# Altium PCB PCB22.PcbDoc
Units mil, origin at the board's own origin, x right, y up, seen from the top; angles counter-clockwise.
Board outline 4850 x 3150 mil, 2 copper layers (Top Layer, Bottom Layer); 33 components, 35 nets, 117 pads, 13 vias.
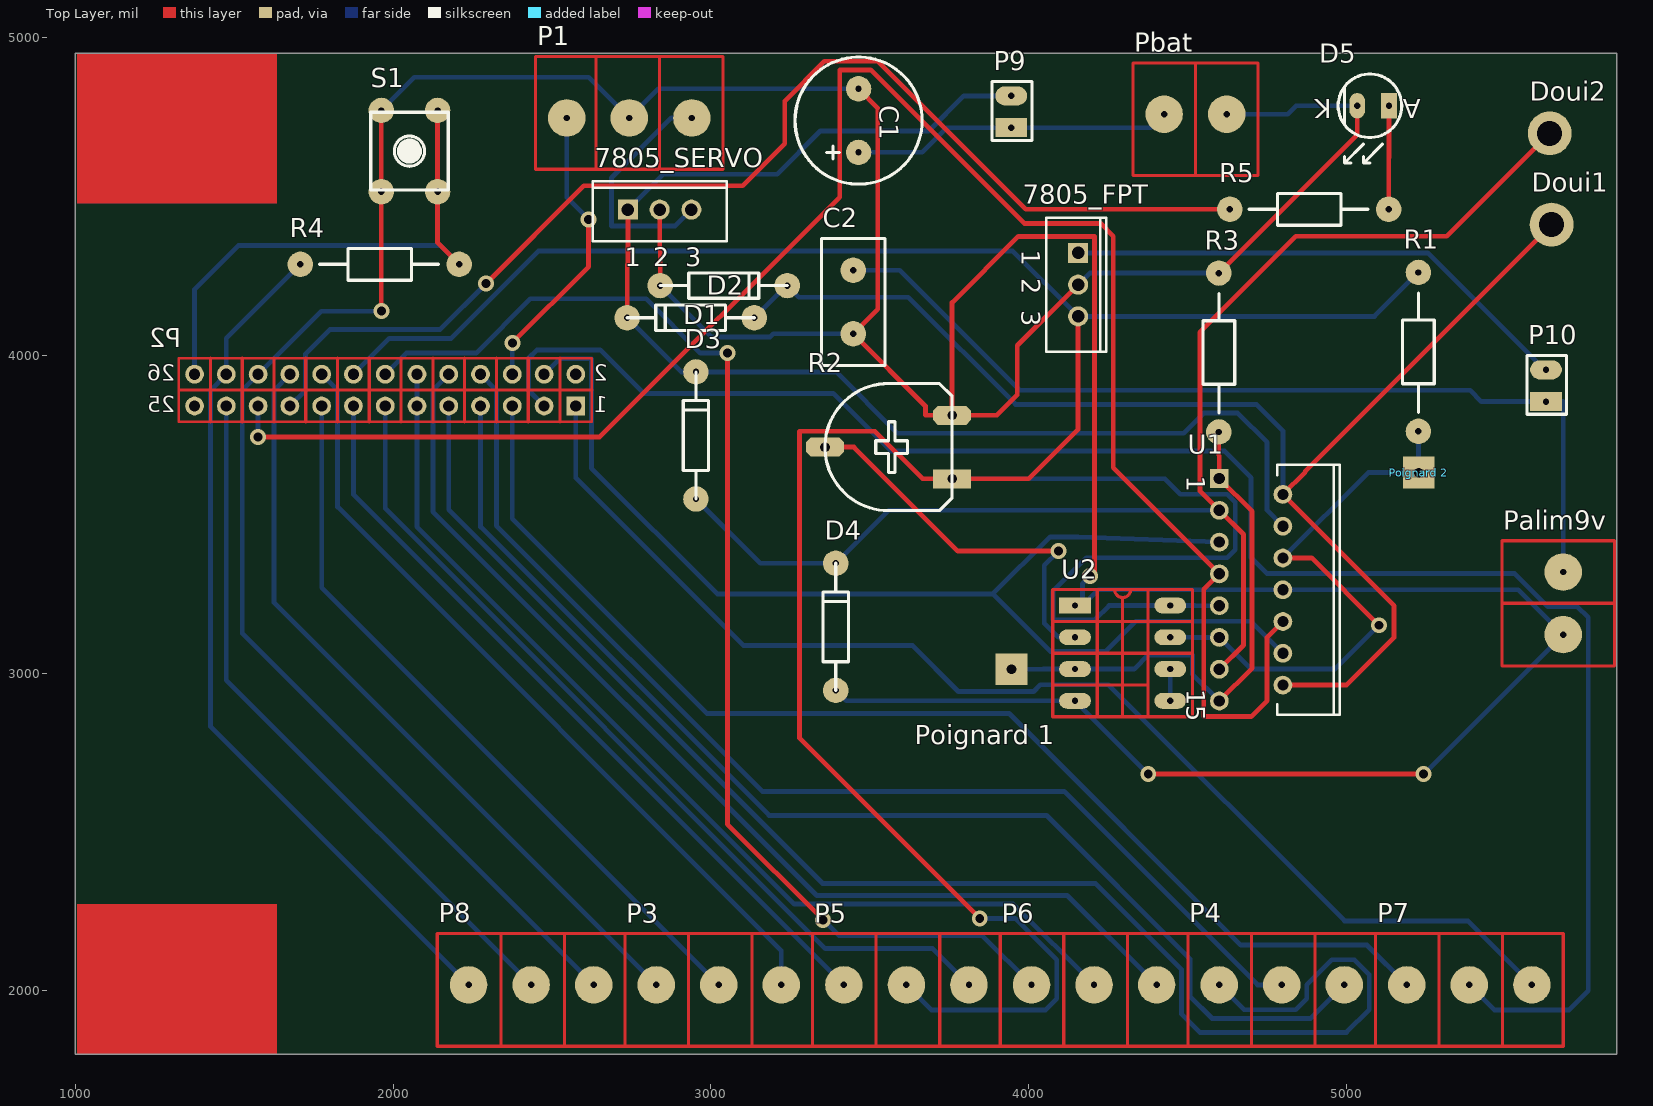
[diagram p0: Top Layer view]
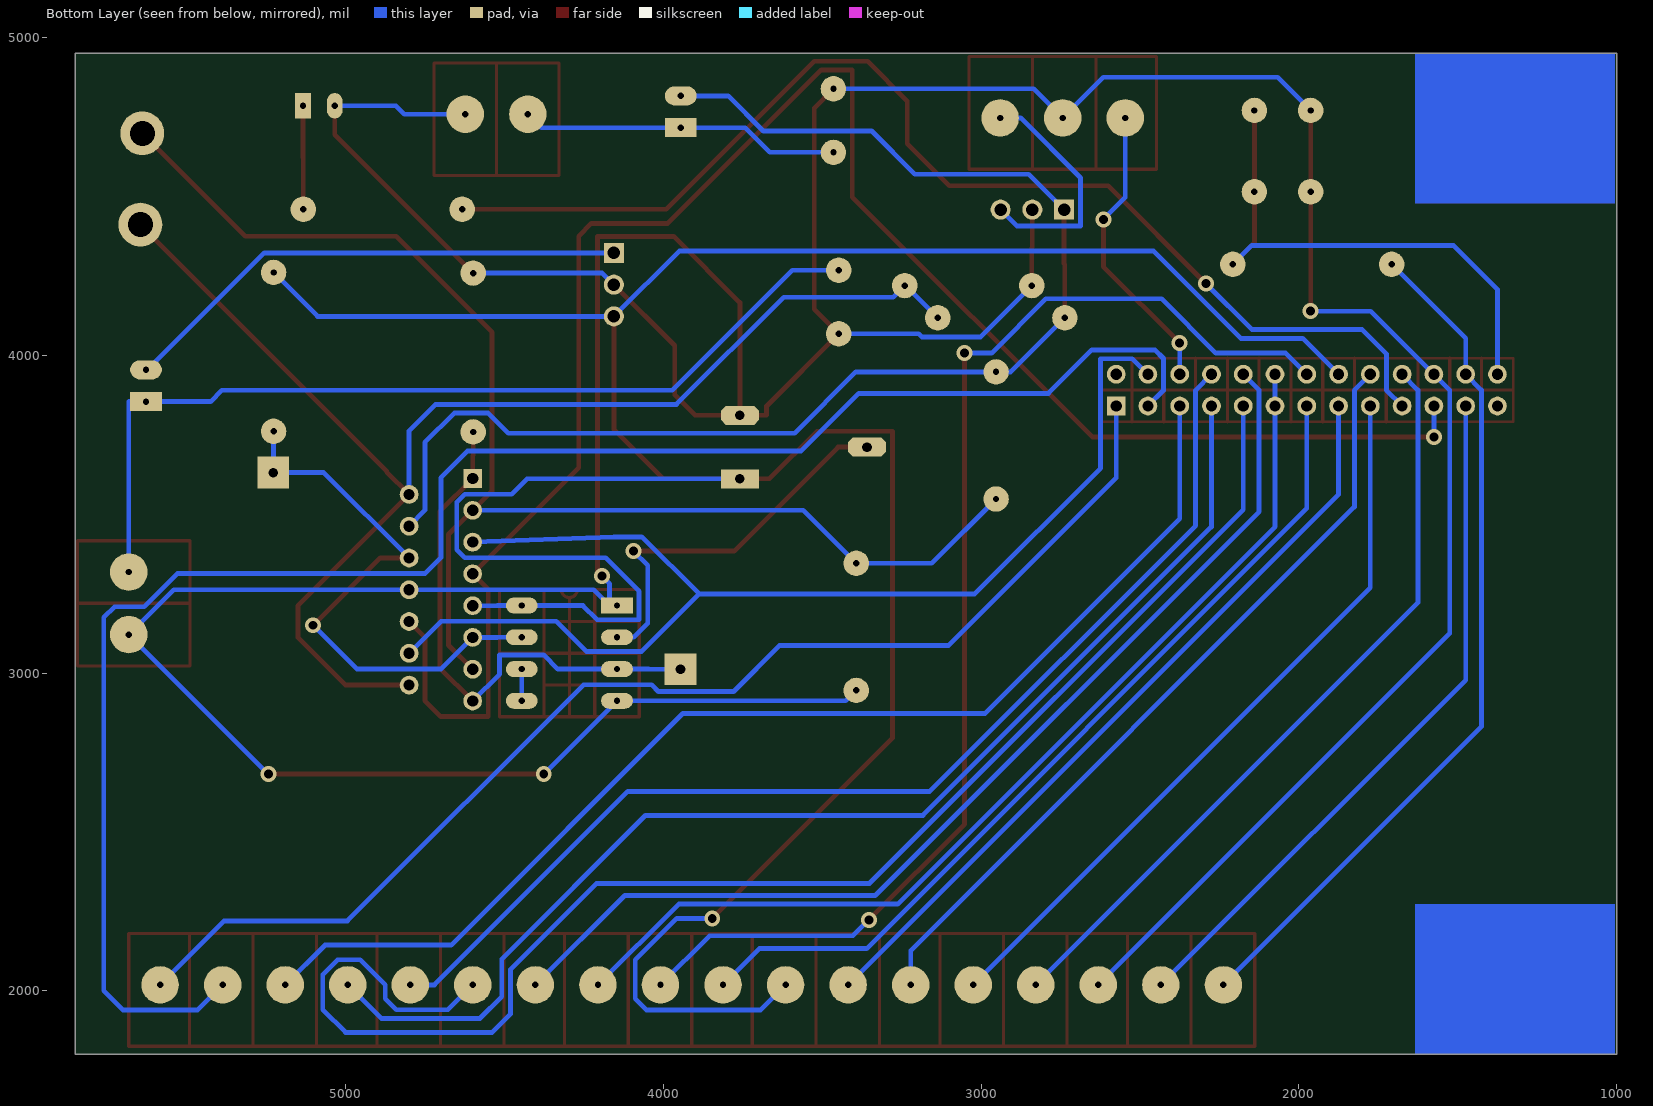
[diagram p1: Bottom Layer view, seen from below]

## Layer stack, top to bottom
Top Layer: signal copper 1.4
Dielectric: dielectric 12.6, FR-4, Dk 4.8
Bottom Layer: signal copper 1.4

## Board outline
1000,4950 5850,4950 5850,1800 1000,1800

## Design rules (kind name [scope] priority, off if disabled: settings)
Clearance [All] p1: gap=12
PolygonConnect [All] p1: connectstyle=Relief reliefconductorwidth=10 reliefentries=4 polygonreliefangle="90 Angle"
RoutingVias [All] p1: holewidth=28 width=50 viastyle="Through Hole" minholewidth=28 minwidth=50 maxholewidth=28 maxwidth=50
SilkscreenOverComponentPads [All] p1: minsilkscreentomaskgap=10
SolderMaskExpansion [All] p1: expansion=4
Width [All] p1: maxlimit=20 minlimit=15 preferedwidth=15
27 further rules are at their usual default settings.

## Classes and differential pairs
component class L298: 7805_FPT 7805_SERVO C1 C2 D1 D2 D3 D4 D5 Doui1 Doui2 P1 P3 P4 P5 P6 P7 P8 P9 P10 Palim9v Pbat "Poignard 1" R1 R2 R3 R4 R5 S1 U1 U2

## Components (designator, comment, footprint, x,y, rotation, side; value= is the part's Value field where it differs from the comment)
7805_FPT "SCR" TO-220-AB 4155.51,4222.44 r270 top
7805_SERVO "SCR" TO-220-AB 2838.58,4458.66 r0 top
C1 "Cap Pol2" Capa2_pol 3464.57,4638.78 r90 top
C2 "Cap2" CAPA2 3447.83,4267.72 r270 top
D1 "Diode 1N4148" Ddiode 2736.22,4118.11 r0 top
D2 "Diode 1N4148" Ddiode 3240.16,4219.49 r180 top
D3 "Diode 1N4148" Ddiode 2952.76,3947.83 r270 top
D4 "Diode 1N4148" Ddiode 3392.72,3345.47 r270 top
D5 "Led" LED 5133.86,4785.43 r180 top
Doui1 "douille_2mm" Douille-2mm 5645.67,4411.42 r90 top
Doui2 "douille_2mm" Douille-2mm 5639.76,4698.82 r90 top
P1 "Bornier Servomoteur" Bornier_3 3038.39,4747.05 r180 top
P2 "Header 13X2" HDR2X13 2574.8,3840.55 r180 top
P3 "Bornier_3" Bornier_3 2729.33,2018.7 r0 top
P4 "Bornier_3" Bornier_3 4500.98,2018.7 r0 top
P5 "Bornier_3" Bornier_3 3319.88,2018.7 r0 top
P6 "Bornier_3" Bornier_3 3910.43,2018.7 r0 top
P7 "Bornier_3" Bornier_3 5091.53,2018.7 r0 top
P8 "Bornier_3" Bornier_3 2138.78,2018.7 r0 top
P9 "Jumper" picot2 3944.88,4716.54 r180 top
P10 "Jumper" picot2 5627.95,3854.33 r180 top
Palim9v "Alim 9V" Bornier_2 5682.09,3416.34 r270 top
Pbat "Batterie" Bornier_2 4327.76,4758.86 r0 top
"Poignard 1" "Poignard" Poignard 3945.87,3011.81 r90 top
"Poignard 2" "Poignard" Poignard 5227.36,3630.91 r90 top
R1 "Res2" res5_1/4W 5226.38,3760.83 r90 top
R2 "RPot" AJUSTABLE 3758.86,3611.22 r90 top
R3 "Res2" res5_1/4W 4598.43,3758.86 r90 top
R4 "Res2" res5_1/4W 1707.68,4286.42 r0 top
R5 "Res2" res5_1/4W 4632.87,4459.65 r0 top
S1 "SW-PB" SW_BP 2051.18,4642.72 r90 top
U1 "L298N" Multiwatt15V 4700,3262.2 r270 top
U2 "LM311N" DIP8 4145.67,3212.6 r0 top

## Footprints (in the part's own frame and the unit in brackets; to place one, negate y for a bottom-side part, rotate by r counter-clockwise, add the part's x,y. Pads: shape width x height; smd on the part's side, far side on the other; paste and mask are expansions set on the pad)
AJUSTABLE [mil]
  rect 60x120 hole 30: 1(0,0)
  oct 60x120 hole 30: 2(100,400) 3(200,0)
  silkscreen extent -100,0 300,400
Bornier_2 [mm]
  round 3 hole 0.508: 1(2.5,0) 2(7.5,0)
  Top Layer lines w0.254: 5,-4.9 5,4.1 ; 10,-4.9 0,-4.9 0,4.1 10,4.1 10,-4.9
Bornier_3 [mm]
  round 3 hole 0.508: 1(2.5,0) 2(7.5,0) 3(12.5,0)
  Top Layer lines w0.254: 10.16,4.1 10.16,-4.9 ; 5.08,4.064 5.08,-4.9 ; 15,4.1 0,4.1 0,-4.9 15,-4.9 15,4.1
CAPA2 [mil]
  round 80 hole 20: 1(0,0) 2(200,0)
  silkscreen extent -100,-100 300,100
Capa2_pol [mil]
  round 80 hole 20: 1(0,0) 2(200,0)
  silkscreen extent -100,-200 300,200
Ddiode [mil]
  round 80 hole 20: A(400,0) K(0,0)
  silkscreen extent 0,-40 400,40
DIP8 [mil]
  rect 100x50 hole 20: 1(0,0)
  oval 100x50 hole 20: 2(0,-100) 3(0,-200) 4(0,-300) 5(300,-300) 6(300,-200) 7(300,-100) 8(300,0)
  Top Layer lines w10: 70,-350 70,50 ; 85,-350 215,-350 ; 85,50 125,50 ccw(c150,50) 175,50 215,50 ; 150,-350 150,20 ; 230,-250 30,-250 -70,-250 ; -70,-250 -70,-350 30,-350 230,-350 ; -70,-250 -70,-150 ; -70,-150 30,-150 270,-150 370,-150 ; -70,-150 -70,-50 ; -70,-50 30,-50 270,-50 370,-50 ; -70,-50 -70,50 30,50 230,50 ; 230,-350 230,50 ; 230,-350 370,-350 370,-250 370,-150 ; 230,50 320,50 370,50 370,-50 ; 370,-150 370,-50
Douille-2mm [mm]
  round 3.5 hole 2: 1(0,0)
HDR2X13 [mm] "Connector; Header; 13x2 Position"
  rect 1.5x1.5 hole 0.9: 1(0,0)
  round 1.5 hole 0.9: 2(0,-2.54) 3(2.54,0) 4(2.54,-2.54) 5(5.08,0) 6(5.08,-2.54) 7(7.62,0) 8(7.62,-2.54) 9(10.16,0) 10(10.16,-2.54) 11(12.7,0) 12(12.7,-2.54) 13(15.24,0) 14(15.24,-2.54) 15(17.78,0) 16(17.78,-2.54) 17(20.32,0) 18(20.32,-2.54) 19(22.86,0) 20(22.86,-2.54) 21(25.4,0) 22(25.4,-2.54) 23(27.94,0) 24(27.94,-2.54) 25(30.48,0) 26(30.48,-2.54)
  Top Layer lines w0.2: 31.75,1.27 -1.27,1.27 -1.27,-3.81 31.75,-3.81 31.75,1.27
  Top Layer lines w0.254: 31.623,-1.27 -1.27,-1.27 ; 29.21,1.27 29.21,-3.81 ; 26.67,1.27 26.67,-3.81 ; 24.13,1.27 24.13,-3.81 ; 21.59,1.27 21.59,-3.81 ; 19.05,1.27 19.05,-3.81 ; 16.51,1.27 16.51,-3.81 ; 13.97,1.27 13.97,-3.81 ; 11.43,1.27 11.43,-3.81 ; 8.89,1.27 8.89,-3.81 ; 6.35,1.27 6.35,-3.81 ; 3.81,1.27 3.81,-3.81 ; 1.27,1.27 1.27,-3.81
LED [mil]
  rect 50x80 hole 20: 1(0,0)
  oval 50x80 hole 20: 2(100,0)
  silkscreen extent -40,-100 160,180
Multiwatt15V [mm] "TO, Thru-Hole, Vertical, Heatsink Mounted; 15 Bent Staggered Leads; Pitch 1.27 mm"
  rect 1.5x1.5 hole 0.9: 1(-8.89,-2.54)
  round 1.5 hole 0.9: 2(-7.62,2.54) 3(-6.35,-2.54) 4(-5.08,2.54) 5(-3.81,-2.54) 6(-2.54,2.54) 7(-1.27,-2.54) 8(0,2.54) 9(1.27,-2.54) 10(2.54,2.54) 11(3.81,-2.54) 12(5.08,2.54) 13(6.35,-2.54) 14(7.62,2.54) 15(8.89,-2.54)
  silkscreen extent -10,2.09 10,7.09
picot2 [mil]
  rect 100x60 hole 20: 1(0,0)
  oval 100x60 hole 20: 2(0,-100)
  silkscreen extent -65,-145 60,40
Poignard [mil]
  rect 100x100 hole 30: 1(0,0)
res5_1/4W [mil]
  round 80 hole 20: 1(0,0) 2(500,0)
  silkscreen extent 60,-50 435,50
SW_BP [mil]
  round 80 hole 20: 1(-127.95,88.58) 2(127.95,88.58) 3(-127.95,-88.58) 4(127.95,-88.58)
  silkscreen extent -122,-122 122,122
TO-220-AB [mm] "TO, Thru-Hole, Vertical, Heatsink Mounted; 3 In-Line Leads; Pitch 2.54 mm"
  rect 1.6x1.6 hole 1: 1(-2.54,0)
  round 1.6 hole 1: 2(0,0) 3(2.54,0)
  silkscreen extent -5.35,-2.55 5.35,2.25

## Part data
7805_FPT 7805_SERVO: "Silicon Controlled Rectifier"
C1: "Polarized Capacitor (Radial)"
C2: "Capacitor"
D1 D2 D3 D4: "High Conductance Fast Diode"
D5: "LED"
Doui1 Doui2: "1-Pin"
P1: library part Bornier_3, "Header, 3-Pin"
P2: "Header, 13-Pin, Dual row"
P3 P4 P5 P6 P7 P8: "Header, 3-Pin"
Palim9v Pbat: library part Bornier_2, "Header, 2-Pin"
R1 R3 R4 R5: "Resistor"
R2: "Potentiometer"
S1: "Switch"
U1: "Dual Full Bridge Driver"
U2: "Voltage Comparator"

## Via types
v1: diameter 50, hole 28, Top Layer to Bottom Layer, 13 vias

## Nets (pads, with @x,y where several pads share a name; then routed paths per layer and width w, separated by ;. In a path a pad name is that pad's centre, name@x,y a point inside that pad or via, vN(x,y) a via of type N, cw(c..) or ccw(c..) an arc to the next point about the centre after c; other vN are vias at no path point)
3V3FLYPORT: P2.24 P8.1 R4.1 | length 2721.2
  Bottom Layer w15: R4.1 1474.8,4053.55 P2.24 1425,3890.75 1425,2830.9 P8.1
AN1_23: P2.23 P8.2 | length 2219.2
  Bottom Layer w15: P2.23 1474.8,2977.95 P8.2
AN4_18: P2.18 P3.3 | length 2521.1
  Bottom Layer w15: P2.18 1825,3890.36 1825,3523 3221.46,2126.54 P3.3
AN5_20: P2.20 P3.1 | length 2440.7
  Bottom Layer w15: P2.20 1625,3890.75 1625,3221.46 P3.1
BOARD_LED: P2.19 R5.1 | length 3746.3
  Top Layer w15: v1(2292,4226) 2600,4534 3100,4534 3232,4666 3232,4800 3357.28,4925.28 3524.72,4925.28 3990.35,4459.65 R5.1
  Bottom Layer w15: P2.19 1724,3889.75 1724,4005 1800,4081 2147,4081 v1(2292,4226)
EN: "Poignard 2.1" R1.1 U1.6 U1.11 U2.7 | length 1813.9
  Top Layer w15: U1.6 4890.75,3362.21 v1(5102.36,3150.59)
  Bottom Layer w15: U2.7 4522,3112.6 4522.39,3112.21 U1.11 4699.21,3013 4964.77,3013 v1(5102.36,3150.59) ; U1.6 5068.7,3630.91 5227.36,3630.91 5226.38,3631.89 R1.1
GND: 7805_FPT.2 7805_SERVO.2 C1.2 C2.2 D2.A D4.A D5.2 P1.2 P2.22 P8.3 Palim9v.2 Pbat.2 R2.3 R3.2 S1.1 S1.2 U1.8 U2.1 U2.4 | length 15826.2
  Top Layer w15: v1(1962.6,4139) S1.1 S1.2 ; 7805_SERVO.2 2838.58,4339.57 2840.16,4338 D2.A ; C1.2 3525,4778.35 3525,4144.88 C2.2 3675,3840.55 3675,3811.22 R2.3 ; 7805_FPT.2 3964,4030.93 3964,3875.22 3900,3811.22 R2.3 ; v1(4193,3305) 4207,3319 4207,4374 3967,4374 3758.86,4165.86 R2.3 ; v1(4376.18,2682.09) v1(5243.11,2682.09) ; R3.2 5033.86,4694.29 D5.2
  Bottom Layer w15: v1(1962.6,4139) 1773.25,4139 P2.22 1525,3890.75 1525,3124.6 P8.3 ; S1.2 2066.93,4875 2615.16,4875 P1.2 2834.84,4838.78 C1.2 ; D2.A 3001.65,4058 3186,4058 3195.72,4067.72 C2.2 ; D4.A 3425.59,2912.6 U2.4 v1(4376.18,2682.09) ; U2.1 U2.1@4169,3212.6 ; 7805_FPT.2 4191.93,4258.86 R3.2 ; v1(4193,3305) 4169,3281 U2.1@4169,3212.6 ; Pbat.2 4815,4758.86 4841.57,4785.43 D5.2 ; v1(5243.11,2682.09) Palim9v.2 5540.94,3262.21 U1.8 4218.61,3262.21 U2.1@4169,3212.6
I2C_CLK: P2.1 P7.3 | length 3913.5
  Bottom Layer w15: P2.1 2574.8,3614.2 3102,3087 3634,3087 3779,2942 4016,2942 4037,2963 4251,2963 4994,2220 5382.36,2220 P7.3
I2C_DATA: P2.3 P7.2 | length 5619.2
  Bottom Layer w15: P2.3 2425.78,3889.58 2425.78,3990 2452.78,4017 2651,4017 2788,3880 3385,3880 3566,3699 4616,3699 4700,3615 4700,3363 4750,3313 5530,3313 5634,3209 5727,3209 5761,3175 5761,2000 5701,1940 5465.51,1940 P7.2
IN1: P2.5 P7.1 | length 3777.8
  Bottom Layer w15: P2.5 2374.8,3485.5 2987.3,2873 3938,2873 4667,2144 5064.66,2144 P7.1
IN2: P2.7 P4.3 | length 3852.4
  Bottom Layer w15: P2.7 2274.8,3460.04 3182.84,2552 4056,2552 4508.12,2099.88 4508.12,1981.88 4576.86,1913.14 4887.55,1913.14 P4.3
IN3: P2.9 P4.1 | length 4743.1
  Bottom Layer w15: P2.9 2174.8,3514.23 3351.03,2338 4210,2338 4481.12,2066.88 4481.12,1926 4538.12,1869 5000,1869 5072,1941 5072,2051 5025,2098 4953.82,2098 4874.82,2019 4874.82,1975 4839.96,1940.14 4677.97,1940.14 P4.1
MOTOR1: D1.A D2.K Doui1.1 U1.2 U1.14 | length 4301.7
  Top Layer w15: U1.14 5000,2962.21 5150,3112.21 5150,3212.21 U1.2 4870,3632.21 4870,3635.75 Doui1.1
  Bottom Layer w15: D1.A 3237.6,4219.49 D2.K 3276.65,4183 3621,4183 3958.64,3845.36 4716.64,3845.36 4800,3762 U1.2
MOTOR2: D3.A D4.K Doui2.1 U1.3 U1.13 | length 4309.2
  Top Layer w15: U1.13 4676.03,3088.23 4676.03,3436.18 U1.3 4538.93,3573.28 4538.93,4072.93 4841,4375 5315.95,4375 Doui2.1
  Bottom Layer w15: D3.A 3155.12,3345.47 D4.K 3559.45,3512.21 U1.3
NetD5_1: D5.1 R5.2 | length 326.2
  Top Layer w15: R5.2 5132.87,4622 5133.86,4622.98 D5.1
"NetPoignard 1_1": "Poignard 1.1" R3.1 U1.1 U1.15 U2.3 | length 1700.7
  Top Layer w15: R3.1 4598.43,3685.57 4600,3684 U1.1 4703.03,3509.18 4703.03,3015.23 U1.15
  Bottom Layer w15: 3945.87,3011.81 4045,3011.81 4045.79,3012.6 U2.3 4331.67,3012.6 4376.17,3057.1 4515.17,3057.1 4515.17,2997.04 U1.15
NetR2_2: R2.2 U2.2 | length 1231.5
  Top Layer w15: R2.2 3450,3711.22 3777.22,3384 v1(4094,3384)
  Bottom Layer w15: v1(4094,3384) 4049.17,3339.17 4049.17,3156.43 4093,3112.6 U2.2
NetU2_5: U2.5 U2.6 | length 100
  Bottom Layer w15: U2.5 U2.6
OUT3_PWM: P2.17 P3.2 | length 2339.5
  Bottom Layer w15: P2.17 1774.8,3268.5 P3.2
PWM1: P2.4 U1.5 U1.12 | length 3797.1
  Bottom Layer w15: P2.4 2523.83,3989.58 2624,3989.58 2624,3645 3020,3249 3887.27,3249 ; U1.5 4154.79,3428.5 4067.95,3428.5 3887.27,3249 ; U1.12 4699.21,3163 4337.07,3163 4242.17,3068.1 4068.17,3068.1 3887.27,3249
PWM2: P2.21 U1.7 U1.10 | length 5878.8
  Top Layer w15: v1(1574.8,3743) 2650,3743 3405.07,4498.07 3405.07,4898.28 3502.72,4898.28 3986,4415 4226,4415 4266,4375 4266,3646.21 U1.7 4550.97,3263.18 4550.97,2863 4700,2863 4750,2913 4750,3112.21 U1.10
  Bottom Layer w15: v1(1574.8,3743) P2.21
PWM_SERVO: P1.3 P2.6 | length 934.5
  Top Layer w15: v1(2374.8,4039) 2615,4279.2 v1(2615,4428)
  Bottom Layer w15: P2.6 v1(2374.8,4039) ; P1.3 2546.26,4496.74 v1(2615,4428)
RST_B: P2.26 R4.2 S1.3 S1.4 | length 1694.3
  Top Layer w15: S1.4 S1.3 2139.76,4354.33 R4.2
  Bottom Layer w15: P2.26 1374.8,4207.61 1513.2,4346 2148.09,4346 R4.2
RX: P2.13 P5.3 | length 2780.7
  Bottom Layer w15: P2.13 1974.8,3518.2 3360,2133 3697.71,2133 P5.3
SPI_CLK_8: P2.8 P4.2 | length 3567.3
  Bottom Layer w15: P2.8 2325,3890.36 2325,3464 3161.42,2627.58 4111.42,2627.58 4720.3,2018.7 P4.2
SPI_CS_14: P2.14 P6.1 | length 3895.5
  Top Layer w15: v1(3052,4007) 3052,2524 v1(3353,2223)
  Bottom Layer w15: P2.14 2041.25,4007 2261,4007 2432,4178 2796,4178 2967,4007 v1(3052,4007) ; v1(3353,2223) 3403,2173 3854.56,2173 P6.1
SPI_IN_12: P2.11 P2.12 P6.2 | length 3208.3
  Bottom Layer w15: P2.12 P2.11 2074.8,3460.2 3262,2273 3951.41,2273 P6.2
SPI_OUT_10: P2.10 P6.3 | length 3347.6
  Bottom Layer w15: P2.10 2125,3890.75 2125,3508 3333,2300 4121.26,2300 P6.3
TX: P2.15 P5.1 | length 2461.2
  Bottom Layer w15: P2.15 1874.8,3562.2 P5.1
V_5V_FPT: 7805_FPT.3 P2.16 P5.2 R1.2 R2.1 U1.9 U2.8 | length 10051
  Top Layer w15: v1(3846,2228) 3279,2795 3279,3761 3516.22,3761 3666,3611.22 R2.1 4000,3611.22 4155.51,3766.73 7805_FPT.3
  Bottom Layer w15: P2.16 1987.25,4053 2182,4053 2457,4328 3949.95,4328 7805_FPT.3 5088,4122.44 R1.2 ; P5.2 3693.86,1940 4053,1940 4088,1975 4088,2098 3958,2228 v1(3846,2228) ; R2.1 4428.78,3611.22 4477,3563 4625,3563 4650,3538 4650,3388 4625,3363 4181.73,3363 4076.17,3257.44 4076.17,3168.1 4208.27,3168.1 4252.77,3212.6 U2.8 4522,3212.6 4522.39,3212.21 U1.9
V_5V_SERVO: 7805_SERVO.3 P1.1 | length 756
  Bottom Layer w15: 7805_SERVO.3 2886.8,4406.87 2687,4406.87 2687,4559.05 2875,4747.05 P1.1
V_9V: 7805_FPT.1 P10.2 | length 1624.9
  Bottom Layer w15: 7805_FPT.1 5255.89,4322.44 5624,3954.33 P10.2
V_9V_BORNIER: C2.1 P10.1 Palim9v.1 | length 2941.9
  Bottom Layer w15: C2.1 3594.28,4267.72 3972,3890 5389.33,3890 5425,3854.33 P10.1 5682.09,3854.33 Palim9v.1
V_BAT: 7805_SERVO.1 D1.K D3.K P9.2 U1.4 | length 4209.5
  Top Layer w15: D1.K 2736.22,4287 2738.58,4289.36 7805_SERVO.1
  Bottom Layer w15: D1.K 2906.5,3947.83 D3.K 3394.17,3947.83 3587,3755 4488,3755 4551.36,3818.36 4658,3818.36 4750,3726.36 4750,3512.21 U1.4 ; 7805_SERVO.1 2849.92,4570 3208,4570 3344,4706 3685,4706 3795.53,4816.53 P9.2
V_BAT_BORNIER: C1.1 P9.1 Pbat.1 | length 1011.4
  Bottom Layer w15: C1.1 3665,4638.78 3742.75,4716.53 P9.1 4383.86,4716.53 Pbat.1
pads on no net: P2.2 P2.25

## Other copper
Multi-Layer:
  rectangle: 1004.92,4477.56 1634.84,4949.81
  rectangle: 1004.92,1800.4 1634.84,2272.64

## Dimensions
5850,1800 to 5850,4950 on Top Layer
5850,1800 to 1000,1800 on Top Layer

## Text inside footprints (layer, text, board x,y; h text height)
7805_FPT: Top Overlay "1" at 3977.36,4332.28 h59.06 r270; Top Overlay "2" at 3977.36,4242.13 h59.06 r270; Top Overlay "3" at 3977.36,4142.13 h59.06 r270
7805_SERVO: Top Overlay "1" at 2728.74,4280.51 h59.06; Top Overlay "2" at 2818.9,4280.51 h59.06; Top Overlay "3" at 2918.9,4280.51 h59.06
D5: Top Overlay "K" at 4953.86,4805.43 h60 r180; Top Overlay "A" at 5233.86,4805.43 h60 r180
P2: Top Overlay "2" at 2674.8,3920.55 h50; Top Overlay "1" at 2674.8,3820.55 h50; Top Overlay "25" at 1314.8,3820.55 h50; Top Overlay "26" at 1314.8,3920.55 h50
U1: Top Overlay "15" at 4496.65,2949.61 h59.06 r270; Top Overlay "1" at 4496.65,3621.26 h59.06 r270